# Altium PCB Dogfish3D R1.0.PcbDoc (part 2 of 2)
Units mil, origin at the board's own origin, x right, y up, seen from the top; angles counter-clockwise.
Board outline 6000 x 4000 mil, 4 copper layers (Top Layer, Groun Plane, Power Plane, Bottom Layer), stack 61.73 mil thick; 227 components, 145 nets, 705 pads, 165 vias.
Unrouted connection lines stored in the file: 286.
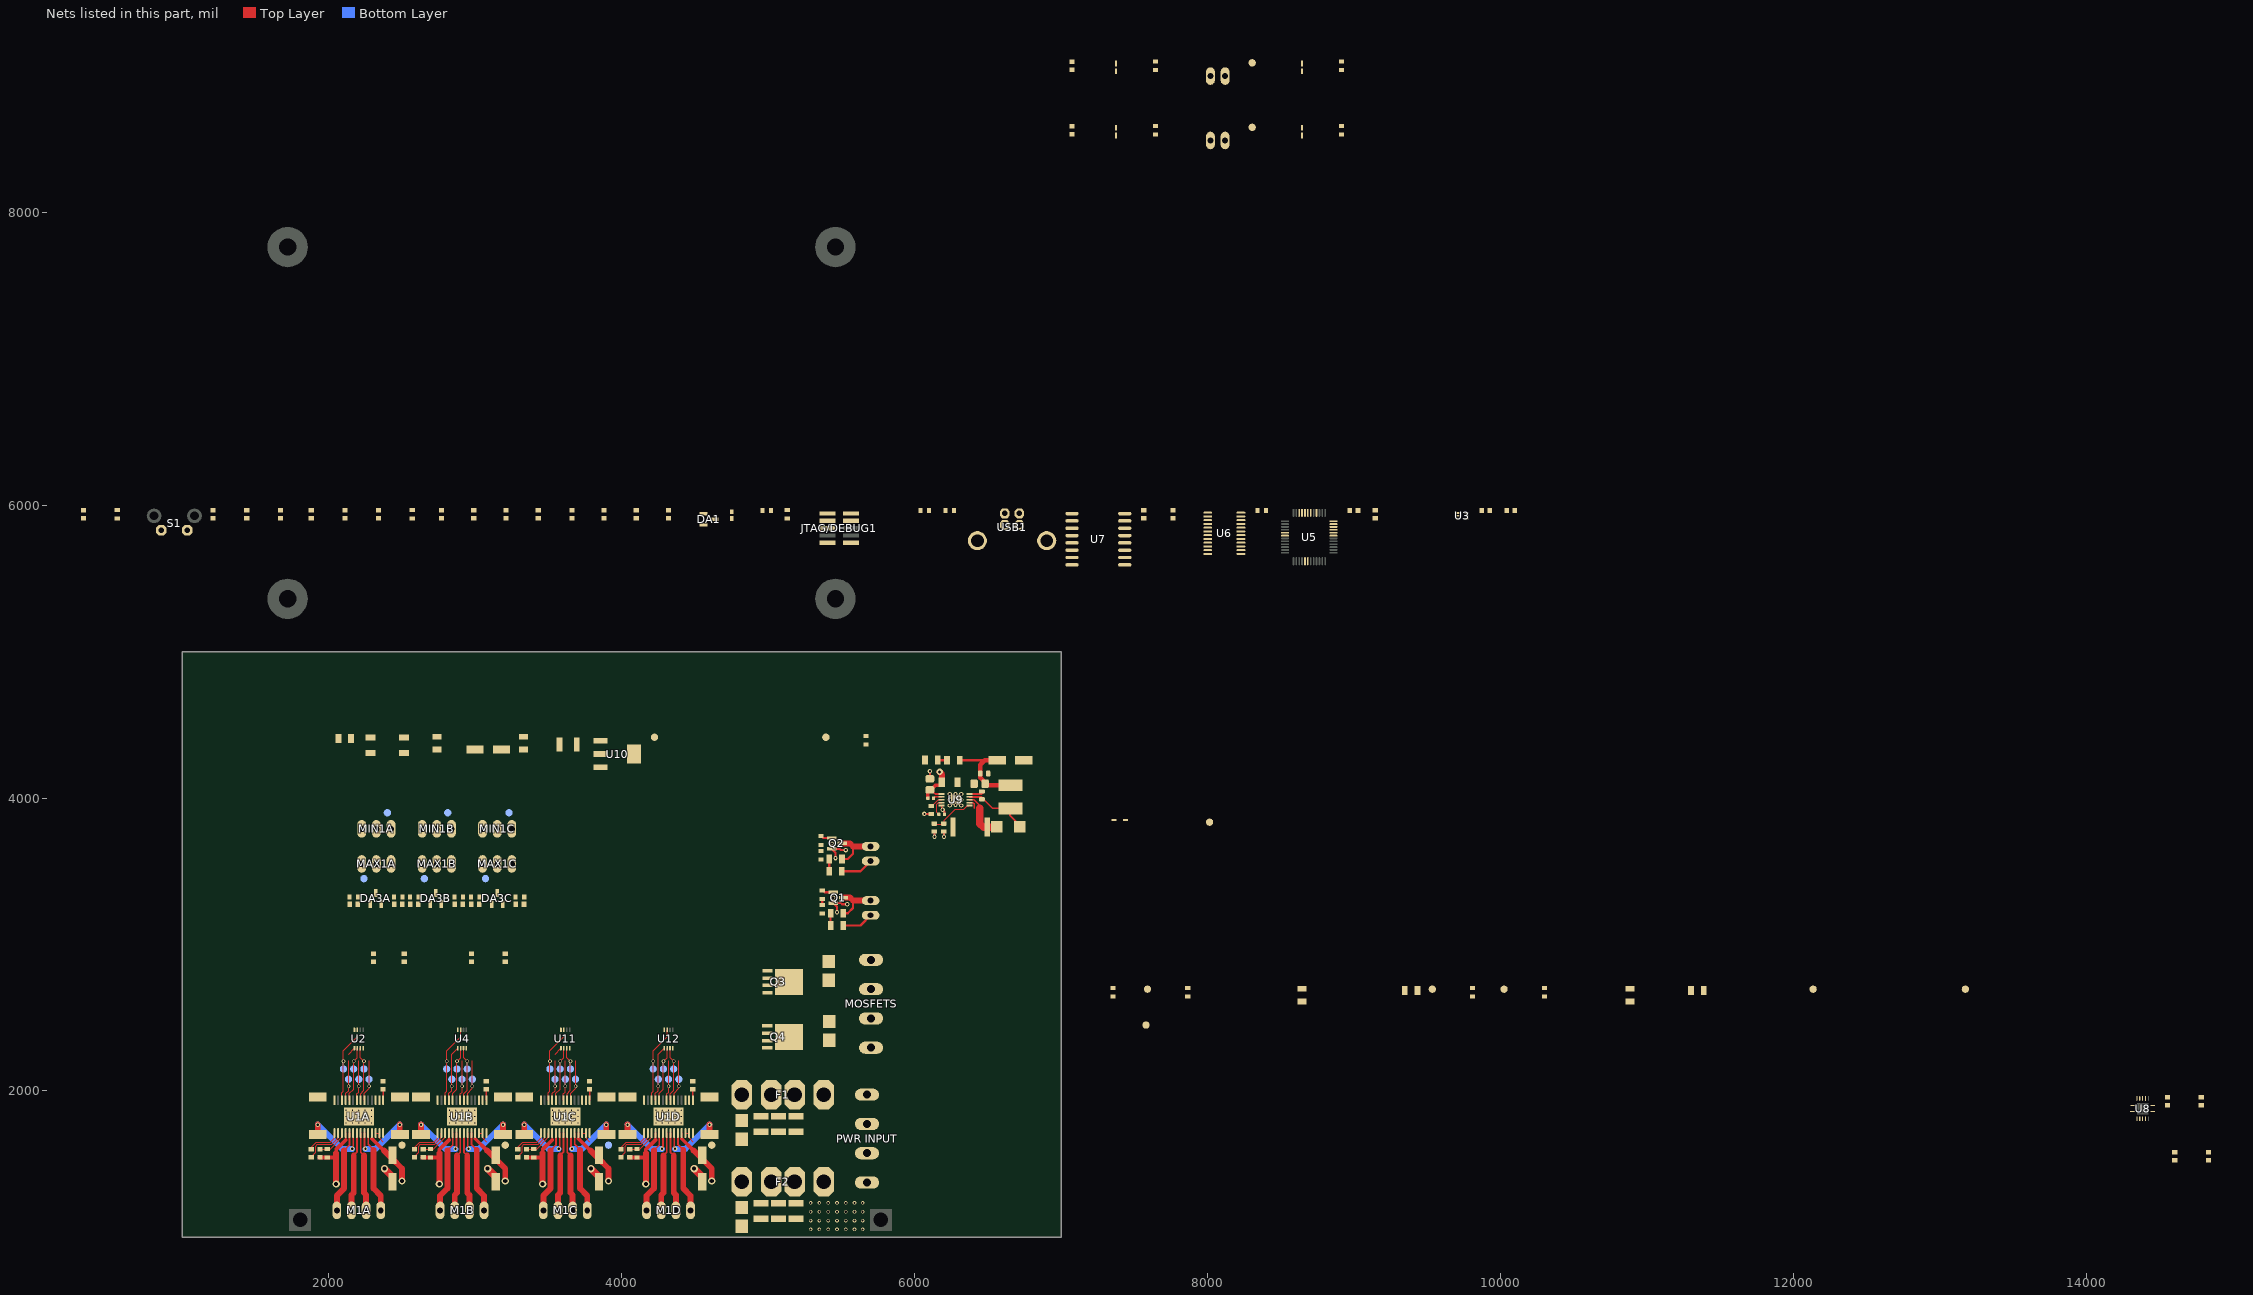
[diagram p4: the nets of this part, all layers, seen from the top]

## Via types
v1: diameter 19.68, hole 7.87, Top Layer to Bottom Layer, 64 vias
v2: diameter 25, hole 15, Top Layer to Bottom Layer, tented both sides, 52 vias
v3: diameter 30, hole 15, Top Layer to Bottom Layer, tented both sides, 27 vias
v4: diameter 50, hole 28, Top Layer to Bottom Layer, tented both sides, 12 vias
v5: diameter 30, hole 15, Top Layer to Bottom Layer, 9 vias
v6: diameter 45, hole 20, Top Layer to Bottom Layer, tented both sides, 1 vias

## Nets (pads, with @x,y where several pads share a name; then routed paths per layer and width w, separated by ;. In a path a pad name is that pad's centre, name@x,y a point inside that pad or via, vN(x,y) a via of type N, cw(c..) or ccw(c..) an arc to the next point about the centre after c; other vN are vias at no path point)
3.3VCC: C7.2 C8.2 C9.2 C10.2 C21.2 C22.2 C23.2 C24.2 C25.2 C26.2 C28.2 C29.2 C45.1 C47.2 C49.2 C50.2 C51.2 C52.2 FB1.2 JTAG/DEBUG1.1 MAX1A.3 MAX1B.3 MAX1C.3 MIN1A.3 MIN1B.3 MIN1C.3 R4A.1 R4B.1 R4C.1 R5A.1 R5B.1 R5C.1 R11.2 R33.2 R34A.2 R34B.2 TP18.1 U1A.16 U1A.17 U1B.16 U1B.17 U1C.16 U1C.17 U1D.16 U1D.17 U2.8 U3.1 U3.2 U3.5 U3.6 U4.8 U5.17 U5.36 U5.44 U8.1 U8.8 U10.3 U11.8 U12.8
+5VCC: C30.2 C31.2 C35.1 C36.1 C37.1 L1.2 R26.2 R27.2 R29.1 R32.1 TP16.1 U8.14 | length 686.4
  Top Layer w15: v3(6066.63,3892.08) R27.2@6114.41,3892.08 ; v3(6200.63,3736.08) R29.1@6200.63,3772.31 ; R26.2@6306.25,4258.02 6383.94,4258.02 6478.94,4258.02
  Top Layer w30: C37.1@6489.03,4099.69 6448.86,4139.86 6448.86,4167.59 6448.86,4227.82 6478.63,4257.59 C36.1@6564.08,4257.59 ; C37.1@6497.29,4087.33 L1.2@6654.63,4087.33
+12VCC1: C1A.1 C1B.1 C1C.1 C1D.1 C3A.1 C3B.1 C3C.1 C3D.1 C42.2 C43.2 C44.2 D11.2 F2.2 R1A.1 R1B.1 R1C.1 R1D.1 R6.1 U1A.4 U1A.11 U1B.4 U1B.11 U1C.4 U1C.11 U1D.4 U1D.11 | length 3675.7
  Top Layer w12: 2115.43,1665.43 U1A.4@2115.43,1712.8 ; 2294.57,1674.43 U1A.11@2294.57,1712.8 ; 2820.43,1665.43 U1B.4@2820.43,1712.8 ; 2999.57,1674.43 U1B.11@2999.57,1712.8 ; 3525.43,1665.43 U1C.4@3525.43,1712.8 ; 3704.57,1674.43 U1C.11@3704.57,1712.8 ; 4230.43,1665.43 U1D.4@4230.43,1712.8 ; 4409.57,1674.43 U1D.11@4409.57,1712.8
  Top Layer w25: C1A.1@1935,1545.47 2050,1545.47 ; 2050,1575 2050,1600 2115.43,1665.43 ; 2294.57,1674.43 2375,1594 ; C1B.1@2640,1545.47 2755,1545.47 ; 2755,1575 2755,1600 2820.43,1665.43 ; 2999.57,1674.43 3080,1594 ; C1C.1@3345,1545.47 3460,1545.47 ; 3460,1575 3460,1600 3525.43,1665.43 ; 3704.57,1674.43 3785,1594 ; C1D.1@4050,1545.47 4165,1545.47 ; 4165,1575 4165,1600 4230.43,1665.43 ; 4409.57,1674.43 4490,1594
  Top Layer w40: v4(2050,1365) 2050,1575 ; 2375,1594 2375,1595 C3A.1@2440,1530 ; C3A.1@2430,1540 2500,1470 v4(2500,1385) ; v4(2755,1365) 2755,1575 ; 3080,1594 3080,1595 C3B.1@3145,1530 ; C3B.1@3135,1540 3205,1470 v4(3205,1385) ; v4(3460,1365) 3460,1575 ; 3785,1594 3785,1595 C3C.1@3850,1530 ; C3C.1@3840,1540 3910,1470 v4(3910,1385) ; v4(4165,1365) 4165,1575 ; 4490,1594 4490,1595 C3D.1@4555,1530 ; C3D.1@4545,1540 4615,1470 v4(4615,1385)
+12VCC2: C32.1 C34.1 C39.2 C40.2 C41.2 D4.2 D6.2 D9.2 F1.2 FAN-1.1 FAN-2.1 MOSFETS.2 MOSFETS.4 R13.1 R16.1 R19.2 R22.2 R25.2 R31.2 U9.1 | length 696.9
  Top Layer w12: C34.1@6131.68,4036.95 6140.83,4027.8 U9.1@6184.83,4027.8
  Top Layer w15: R13.1@5503.31,3130 5630,3130 FAN-1.1@5700,3200 ; R16.1@5503.31,3500 5630,3500 FAN-2.1@5700,3570
  Top Layer w24: R25.2@6091.14,3997.22 C34.1@6091.14,4034.82 ; C34.1@6110.31,4054.02 6142.72,4086.43 C32.1@6168.15,4086.43
  Top Layer w40: v6(6171,4179) 6188.17,4161.83 C32.1@6188.17,4106.43
DIR1: TP6A.1 U1A.20 | length 333.1
  Top Layer w8: U1A.20@2243.54,1935 2243.54,1986.18 2275.16,2017.8 v2(2275.16,2032.8) 2275.16,2205
  Bottom Layer w8: v2(2275.16,2032.8) TP6A.1@2275.16,2082.8
DIR2: TP6B.1 U1B.20 | length 333.1
  Top Layer w8: U1B.20@2948.54,1935 2948.54,1986.18 2980.16,2017.8 v2(2980.16,2032.8) 2980.16,2205
  Bottom Layer w8: v2(2980.16,2032.8) TP6B.1@2980.16,2082.8
DIR3: TP6C.1 U1C.20 | length 333.1
  Top Layer w8: U1C.20@3653.54,1935 3653.54,1986.18 3685.16,2017.8 v2(3685.16,2032.8) 3685.16,2205
  Bottom Layer w8: v2(3685.16,2032.8) TP6C.1@3685.16,2082.8
DIR4: TP6D.1 U1D.20 | length 333.1
  Top Layer w8: U1D.20@4358.54,1935 4358.54,1986.18 4390.16,2017.8 v2(4390.16,2032.8) 4390.16,2205
  Bottom Layer w8: v2(4390.16,2032.8) TP6D.1@4390.16,2082.8
DRV_REF_CS: U6.5
DRV_REF_MOSI: U6.7
DRV_REF_SCLK: U6.8
E0_DRV_REF: TP1D.1 U1D.12 U1D.13 U6.17 | length 93.4
  Top Layer w8: U1D.12@4435.16,1712.8 U1D.13@4460.75,1712.8 4460.75,1679.25 4485,1655
EN1: TP2A.1 U1A.21 U2.7 | length 431.7
  Top Layer w8: U2.7@2214.84,2292.01 2214.84,2228.11 v2(2240.16,2202.8) 2240.16,2004.01 2217.95,1981.8 U1A.21@2217.95,1935
  Bottom Layer w8: TP2A.1@2240.16,2147.8 v2(2240.16,2202.8)
EN2: TP2B.1 U1B.21 U4.7 | length 431.7
  Top Layer w8: U4.7@2919.84,2292.01 2919.84,2228.11 v2(2945.16,2202.8) 2945.16,2004.01 2922.95,1981.8 U1B.21@2922.95,1935
  Bottom Layer w8: TP2B.1@2945.16,2147.8 v2(2945.16,2202.8)
EN3: TP2C.1 U1C.21 U11.7 | length 431.7
  Top Layer w8: U11.7@3624.84,2292.01 3624.84,2228.11 v2(3650.16,2202.8) 3650.16,2004.01 3627.95,1981.8 U1C.21@3627.95,1935
  Bottom Layer w8: TP2C.1@3650.16,2147.8 v2(3650.16,2202.8)
EN4: TP2D.1 U1D.21 U12.7 | length 431.7
  Top Layer w8: U12.7@4329.84,2292.01 4329.84,2228.11 v2(4355.16,2202.8) 4355.16,2004.01 4332.95,1981.8 U1D.21@4332.95,1935
  Bottom Layer w8: TP2D.1@4355.16,2147.8 v2(4355.16,2202.8)
EXP0_DRV_REF: U6.14
EXP1_DRV_REF: U6.11
GND: "PWR INPUT.2" "PWR INPUT.4" C3A.2 C3B.2 C3C.2 C3D.2 C4A.1 C4B.1 C4C.1 C4D.1 C5A.2 C5B.2 C5C.2 C6A.2 C6B.2 C6C.2 C7.1 C8.1 C9.1 C10.1 C11.1 C12.1 C13.1 C14.1 C17.1 C18.1 C19.1 C20.1 C21.1 C22.1 C23.1 C24.1 C25.1 C26.1 C27.1 C32.2 C34.2 C35.2 C36.2 C37.2 C38.2 C39.1 C40.1 C41.1 C42.1 C43.1 C44.1 C45.2 C46.1 C47.1 C48A.1 C48B.1 C49.1 C50.1 C51.1 C52.1 D8.1 D9.1 D10.1 D11.1 D12.1 D14A.1 D14B.1 DA3A.3 DA3B.3 DA3C.3 JTAG/DEBUG1.3 JTAG/DEBUG1.5 JTAG/DEBUG1.9 MAX1A.2 MAX1B.2 MAX1C.2 MIN1A.2 MIN1B.2 MIN1C.2 P1A.2 P1B.2 Q1.2 Q2.2 Q3.1 Q3.2 Q3.3 Q4.1 Q4.2 Q4.3 R2A.1 R2B.1 R2C.1 R2D.1 R3A.1 R3B.1 R3C.1 R3D.1 R15.2 R18.2 R21.2 R24.2 R28.1 R30.2 S1.2 U1A.14 U1A.28 U1A.29 U1B.14 U1B.28 U1B.29 U1C.14 U1C.28 U1C.29 U1D.14 U1D.28 U1D.29 U2.4 U4.4 U5.5 U5.18 U5.35 U5.42 U6.3 U6.4 U6.9 U6.10 U6.13 U6.16 U6.21 U6.24 U7.9 U7.15 U9.5 U9.7 U9.11 U10.2 U10.4 U11.4 U12.4 | length 1094.3
  Top Layer w8: v3@5434.57,3689.57 v3(5435,3690) ; v3@5444.57,3319.57 v3(5445,3320)
  Top Layer w10: C3A.2@2435,1379.45 C3A.2@2435,1415 ; C3B.2@3140,1379.45 C3B.2@3140,1415 ; C3C.2@3845,1379.45 C3C.2@3845,1415 ; C3D.2@4550,1379.45 C3D.2@4550,1415 ; v3@6184.65,3926.97 U9.5@6184.65,3949.11
  Top Layer w12: v3@6184.65,3926.97 6205.14,3906.48 ; U9.7@6373.8,3968.74 6398.49,3968.74 6406.88,3960.35 6406.88,3929.87
  Top Layer w15: v3@5434.57,3689.57 Q2.2@5434.57,3652.6 ; v3@5444.57,3319.57 Q1.2@5444.57,3282.6 ; v3(5460,3590) 5460,3627.17 Q2.2@5434.57,3652.6 ; v3(5470,3220) 5470,3257.17 Q1.2@5444.57,3282.6 ; v3(5530,3645) 5495,3645 5487.4,3652.6 Q2.2@5434.57,3652.6 ; v3(5540,3275) 5505,3275 5497.4,3282.6 Q1.2@5444.57,3282.6 ; C34.2@6104.63,4131.85 v3(6104.63,4182.85) ; v3(6135.63,3736.08) R30.2@6135.64,3772.3 ; C38.2@6205.14,3889.48 6205.14,3906.48
  Top Layer w50: v4(2380,1470) C3A.2@2435,1415 ; v4(3085,1470) C3B.2@3140,1415 ; v4(3790,1470) C3C.2@3845,1415 ; v4(4495,1470) C3D.2@4550,1415
  other v1: 2118.39,1781.69 2161.69,1781.69 2205,1781.69 2248.31,1781.69 2291.61,1781.69 2823.39,1781.69 2866.69,1781.69 2910,1781.69 2953.31,1781.69 2996.61,1781.69 3528.39,1781.69 3571.69,1781.69 3615,1781.69 3658.31,1781.69 3701.61,1781.69 4233.39,1781.69 4276.69,1781.69 4320,1781.69 4363.31,1781.69 4406.61,1781.69 2118.39,1825 2161.69,1825 2205,1825 2248.31,1825 2291.61,1825 2823.39,1825 2866.69,1825 2910,1825 2953.31,1825 2996.61,1825 3528.39,1825 3571.69,1825 3615,1825 3658.31,1825 3701.61,1825 4233.39,1825 4276.69,1825 4320,1825 4363.31,1825 4406.61,1825 2118.39,1868.31 2161.69,1868.31 2205,1868.31 2248.31,1868.31 2291.61,1868.31 2823.39,1868.31 2866.69,1868.31 2910,1868.31 2953.31,1868.31 2996.61,1868.31 3528.39,1868.31 3571.69,1868.31 3615,1868.31 3658.31,1868.31 3701.61,1868.31 4233.39,1868.31 4276.69,1868.31 4320,1868.31 4363.31,1868.31 4406.61,1868.31
  other v2: 5290,1055 5350,1055 5410,1055 5470,1055 5530,1055 5590,1055 5645,1055 5290,1115 5350,1115 5410,1115 5470,1115 5530,1115 5590,1115 5645,1115 5290,1176 5350,1176 5410,1176 5470,1176 5530,1176 5590,1176 5645,1176 5290,1236 5350,1236 5410,1236 5470,1236 5530,1236 5590,1236 5645,1236
  other v3: 6191.14,3920.48
  other v5: 6239.94,3949.06 6318.49,3949.11 6279.31,3953.43 6239.94,3988.43 6279.31,3988.43 6318.68,3988.43 6239.94,4027.8 6279.31,4027.8 6318.68,4027.8
INPUT_GND: C15.1 C16.1 DA1.3 U7.2 U7.8 USB1.4 USB1.5 USB1.6
MAX_ES1: C6A.1 DA3A.1 MAX1A.1 R5A.2 TP9A.1
MAX_ES2: C6B.1 DA3B.1 MAX1B.1 R5B.2 TP9B.1
MAX_ES3: C6C.1 DA3C.1 MAX1C.1 R5C.2 TP9C.1
MIN_ES1: C5A.1 DA3A.2 MIN1A.1 R4A.2 TP8A.1
MIN_ES2: C5B.1 DA3B.2 MIN1B.1 R4B.2 TP8B.1
MIN_ES3: C5C.1 DA3C.2 MIN1C.1 R4C.2 TP8C.1
MOD0E1: TP5A.1 U1A.24 U2.6 | length 434.4
  Top Layer w8: U1A.24@2141.18,1935 2141.18,1983.82 2170.16,2012.8 v2(2170.16,2202.8) 2195.16,2227.8 U2.6@2195.16,2292.01
  Bottom Layer w8: TP5A.1@2170.16,2147.8 v2(2170.16,2202.8)
MOD0E2: TP5B.1 U1B.24 U4.6 | length 434.4
  Top Layer w8: U1B.24@2846.18,1935 2846.18,1983.82 2875.16,2012.8 v2(2875.16,2202.8) 2900.16,2227.8 U4.6@2900.16,2292.01
  Bottom Layer w8: TP5B.1@2875.16,2147.8 v2(2875.16,2202.8)
MOD0E3: TP5C.1 U1C.24 U11.6 | length 434.4
  Top Layer w8: U1C.24@3551.18,1935 3551.18,1983.82 3580.16,2012.8 v2(3580.16,2202.8) 3605.16,2227.8 U11.6@3605.16,2292.01
  Bottom Layer w8: TP5C.1@3580.16,2147.8 v2(3580.16,2202.8)
MOD0E4: TP5D.1 U1D.24 U12.6 | length 434.4
  Top Layer w8: U1D.24@4256.18,1935 4256.18,1983.82 4285.16,2012.8 v2(4285.16,2202.8) 4310.16,2227.8 U12.6@4310.16,2292.01
  Bottom Layer w8: TP5D.1@4285.16,2147.8 v2(4285.16,2202.8)
MOD1E1: TP4A.1 U1A.25 U2.5 | length 385.1
  Top Layer w8: U1A.25@2115.59,1935 2115.59,1983.23 2135.16,2002.8 v2(2135.16,2032.8) 2135.16,2205 ; 2135.16,2251.69 U2.5@2175.47,2292.01
  Bottom Layer w8: v2(2135.16,2032.8) TP4A.1@2135.16,2082.8
MOD1E2: TP4B.1 U1B.25 U4.5 | length 431.8
  Top Layer w8: U1B.25@2820.59,1935 2820.59,1983.23 2840.16,2002.8 v2(2840.16,2032.8) 2840.16,2251.69 U4.5@2880.47,2292.01
  Bottom Layer w8: v2(2840.16,2032.8) TP4B.1@2840.16,2082.8
MOD1E3: TP4C.1 U1C.25 U11.5 | length 385.1
  Top Layer w8: U1C.25@3525.59,1935 3525.59,1983.23 3545.16,2002.8 v2(3545.16,2032.8) 3545.16,2205 ; 3545.16,2251.69 U11.5@3585.47,2292.01
  Bottom Layer w8: v2(3545.16,2032.8) TP4C.1@3545.16,2082.8
MOD1E4: TP4D.1 U1D.25 U12.5 | length 431.8
  Top Layer w8: U1D.25@4230.59,1935 4230.59,1983.23 4250.16,2002.8 v2(4250.16,2032.8) 4250.16,2251.69 U12.5@4290.47,2292.01
  Bottom Layer w8: v2(4250.16,2032.8) TP4D.1@4250.16,2082.8
MOD2E1: TP3A.1 U1A.26 U2.3 | length 533.7
  Top Layer w8: U1A.26@2090,1935 2090,1987.64 2100.16,1997.8 v2(2100.16,2202.8) 2100.16,2275.16 2195.16,2370.16
  Bottom Layer w8: TP3A.1@2100.16,2147.8 v2(2100.16,2202.8)
MOD2E2: TP3B.1 U1B.26 U4.3 | length 581.5
  Top Layer w8: U1B.26@2795,1935 2795,1987.64 2805.16,1997.8 v2(2805.16,2202.8) 2805.16,2275.16 2900.16,2370.16 U4.3@2900.16,2417.99
  Bottom Layer w8: TP3B.1@2805.16,2147.8 v2(2805.16,2202.8)
MOD2E3: TP3C.1 U1C.26 U11.3 | length 533.7
  Top Layer w8: U1C.26@3500,1935 3500,1987.64 3510.16,1997.8 v2(3510.16,2202.8) 3510.16,2275.16 3605.16,2370.16
  Bottom Layer w8: TP3C.1@3510.16,2147.8 v2(3510.16,2202.8)
MOD2E4: TP3D.1 U1D.26 U12.3 | length 581.5
  Top Layer w8: U1D.26@4205,1935 4205,1987.64 4215.16,1997.8 v2(4215.16,2202.8) 4215.16,2275.16 4310.16,2370.16 U12.3@4310.16,2417.99
  Bottom Layer w8: TP3D.1@4215.16,2147.8 v2(4215.16,2202.8)
NetC1A_2: C1A.2 R1A.2 U1A.3 | length 217.6
  Top Layer w8: C1A.2@1935,1602.56 2008.77,1602.56 2089.84,1683.63 U1A.3@2089.84,1712.8
NetC1B_2: C1B.2 R1B.2 U1B.3 | length 217.6
  Top Layer w8: C1B.2@2640,1602.56 2713.77,1602.56 2794.84,1683.63 U1B.3@2794.84,1712.8
NetC1C_2: C1C.2 R1C.2 U1C.3 | length 217.6
  Top Layer w8: C1C.2@3345,1602.56 3418.77,1602.56 3499.84,1683.63 U1C.3@3499.84,1712.8
NetC1D_2: C1D.2 R1D.2 U1D.3 | length 217.6
  Top Layer w8: C1D.2@4050,1602.56 4123.77,1602.56 4204.84,1683.63 U1D.3@4204.84,1712.8
NetC2A_1: C2A.1 U1A.1 | length 241.2
  Top Layer w8: C2A.1@1875,1595 1875,1610 1915,1650 2010,1650 2038.66,1678.66 U1A.1@2038.66,1712.8
NetC2A_2: C2A.2 U1A.2 | length 301.6
  Top Layer w8: C2A.2@1875,1547.44 1910,1582.44 1910,1623.79 1921.21,1635 2020,1635 2064.25,1679.25 U1A.2@2064.25,1712.8
NetC2B_1: C2B.1 U1B.1 | length 241.2
  Top Layer w8: C2B.1@2580,1595 2580,1610 2620,1650 2715,1650 2743.66,1678.66 U1B.1@2743.66,1712.8
NetC2B_2: C2B.2 U1B.2 | length 301.6
  Top Layer w8: C2B.2@2580,1547.44 2615,1582.44 2615,1623.79 2626.21,1635 2725,1635 2769.25,1679.25 U1B.2@2769.25,1712.8
NetC2C_1: C2C.1 U1C.1 | length 241.2
  Top Layer w8: C2C.1@3285,1595 3285,1610 3325,1650 3420,1650 3448.66,1678.66 U1C.1@3448.66,1712.8
NetC2C_2: C2C.2 U1C.2 | length 301.6
  Top Layer w8: C2C.2@3285,1547.44 3320,1582.44 3320,1623.79 3331.21,1635 3430,1635 3474.25,1679.25 U1C.2@3474.25,1712.8
NetC2D_1: C2D.1 U1D.1 | length 241.2
  Top Layer w8: C2D.1@3990,1595 3990,1610 4030,1650 4125,1650 4153.66,1678.66 U1D.1@4153.66,1712.8
NetC2D_2: C2D.2 U1D.2 | length 301.6
  Top Layer w8: C2D.2@3990,1547.44 4025,1582.44 4025,1623.79 4036.21,1635 4135,1635 4179.25,1679.25 U1D.2@4179.25,1712.8
NetC4A_2: C4A.2 U1A.15 | length 73.9
  Top Layer w10: U1A.15@2371.34,1937.2 C4A.2@2371.34,2011.1
NetC4B_2: C4B.2 U1B.15 | length 73.9
  Top Layer w10: U1B.15@3076.34,1937.2 C4B.2@3076.34,2011.1
NetC4C_2: C4C.2 U1C.15 | length 73.9
  Top Layer w10: U1C.15@3781.34,1937.2 C4C.2@3781.34,2011.1
NetC4D_2: C4D.2 U1D.15 | length 73.9
  Top Layer w10: U1D.15@4486.34,1937.2 C4D.2@4486.34,2011.1
NetC11_2: C11.2 C12.2 U6.6
NetC13_2: C13.2 U7.12 U7.14
NetC15_2: C15.2 U7.1 USB1.1
NetC16_2: C16.2 U7.3 U7.4 U7.5
NetC17_2: C17.2 C18.2 FB1.1 U5.6
NetC19_2: C19.2 C20.2 U5.43
NetC28_1: C28.1 C29.1 C30.1 C31.1 U8.7
NetC33_1: C33.1 U9.10 | length 93.4
  Top Layer w12: U9.10@6373.8,4027.8 6458.8,4027.8 C33.1@6464.77,4033.77
NetC33_2: C33.2 D7.C L1.1 U9.9 | length 475.6
  Top Layer w12: U9.9@6373.8,4008.11 6455.12,4008.11 6483,3980.23 6531.97,3931.26 6651,3931.26 6651,3881.74 D7.C@6733.74,3799
NetC38_1: C38.1 U9.4 | length 112.3
  Top Layer w8: C38.1@6167.13,3888.43 6152.35,3903.2 6152.35,3958.12 6162.4,3968.17 U9.4@6184.65,3968.17
NetC46_2: C46.2 F3.1 U10.1
NetD1_1: D1.1 FAN-1.2 Q1.3 | length 335
  Top Layer w15: D1.1@5503.39,3213.5 5543.5,3213.5 5580,3250 5580,3300
  Top Layer w40: Q1.3@5515,3320 5560,3320 5580,3300 FAN-1.2@5700,3300
NetD1_2: D1.2 R13.2 | length 83.4
  Top Layer w15: R13.2@5426.77,3130.08 D1.2@5426.77,3213.5
NetD2_1: D2.1 FAN-2.2 Q2.3 | length 335
  Top Layer w15: D2.1@5503.39,3583.5 5543.5,3583.5 5580,3620 5580,3670
  Top Layer w40: Q2.3@5515,3690 5560,3690 5580,3670 FAN-2.2@5700,3670
NetD2_2: D2.2 R16.2 | length 83.4
  Top Layer w15: R16.2@5416.77,3500.08 D2.2@5416.77,3583.5
NetD3_1: D3.1 D4.1 MOSFETS.3 Q3.5 TP12.1
NetD3_2: D3.2 R19.1
NetD5_1: D5.1 D6.1 MOSFETS.1 Q4.5 TP14.1
NetD5_2: D5.2 R22.1
NetD7_A: D7.A R28.2 U9.8 | length 307.6
  Top Layer w12: U9.8@6373.8,3988.43 6405.67,3988.43 6444.88,3949.22
  Top Layer w50: 6444.88,3930 6444.88,3825.26 6470.14,3800 ; R28.2@6485.14,3800 D7.A@6565,3800
NetD8_2: D8.2 R26.1 | length 64.1
  Top Layer w8: D8.2@6157.54,4259.92 D8.2@6159.04,4258.43
  Top Layer w15: D8.2@6159.04,4258.43 R26.1@6221.01,4258.43
NetD10_2: D10.2 D13A.2 D13B.2 R31.1 TP17.1
NetD12_2: D12.2 R33.1
NetF1_1: "PWR INPUT.1" F1.1
NetF2_1: "PWR INPUT.3" F2.1
NetF3_2: F3.2 R32.2
NetM1A_1: M1A.1 U1A.5 | length 563.4
  Top Layer w12: 2105,1595 2141.02,1631.02 U1A.5@2141.02,1712.8
  Top Layer w40: M1A.1@2055,1185 2055,1285 2105,1335 2105,1595
NetM1A_2: M1A.2 U1A.7 | length 543.2
  Top Layer w12: 2170,1560 2192.2,1582.2 U1A.7@2192.2,1712.8
  Top Layer w40: M1A.2@2155,1185 2155,1290 2170,1305 2170,1560
NetM1A_3: M1A.3 U1A.8 | length 543.2
  Top Layer w12: U1A.8@2217.8,1712.8 2217.8,1582.2 2240,1560
  Top Layer w40: 2240,1560 2240,1305 2255,1290 M1A.3@2255,1185
NetM1A_4: M1A.4 U1A.10 | length 563.4
  Top Layer w12: U1A.10@2268.98,1712.8 2268.98,1635 2305,1598.98
  Top Layer w40: 2305,1598.98 2305,1335 2355,1285 M1A.4@2355,1185
NetM1B_1: M1B.1 U1B.5 | length 563.4
  Top Layer w12: 2810,1595 2846.02,1631.02 U1B.5@2846.02,1712.8
  Top Layer w40: M1B.1@2760,1185 2760,1285 2810,1335 2810,1595
NetM1B_2: M1B.2 U1B.7 | length 543.2
  Top Layer w12: 2875,1560 2897.2,1582.2 U1B.7@2897.2,1712.8
  Top Layer w40: M1B.2@2860,1185 2860,1290 2875,1305 2875,1560
NetM1B_3: M1B.3 U1B.8 | length 543.2
  Top Layer w12: U1B.8@2922.8,1712.8 2922.8,1582.2 2945,1560
  Top Layer w40: 2945,1560 2945,1305 2960,1290 M1B.3@2960,1185
NetM1B_4: M1B.4 U1B.10 | length 563.4
  Top Layer w12: U1B.10@2973.98,1712.8 2973.98,1635 3010,1598.98
  Top Layer w40: 3010,1598.98 3010,1335 3060,1285 M1B.4@3060,1185
NetM1C_1: M1C.1 U1C.5 | length 563.4
  Top Layer w12: 3515,1595 3551.02,1631.02 U1C.5@3551.02,1712.8
  Top Layer w40: M1C.1@3465,1185 3465,1285 3515,1335 3515,1595
NetM1C_2: M1C.2 U1C.7 | length 543.2
  Top Layer w12: 3580,1560 3602.2,1582.2 U1C.7@3602.2,1712.8
  Top Layer w40: M1C.2@3565,1185 3565,1290 3580,1305 3580,1560
NetM1C_3: M1C.3 U1C.8 | length 543.2
  Top Layer w12: U1C.8@3627.8,1712.8 3627.8,1582.2 3650,1560
  Top Layer w40: 3650,1560 3650,1305 3665,1290 M1C.3@3665,1185
NetM1C_4: M1C.4 U1C.10 | length 563.4
  Top Layer w12: U1C.10@3678.98,1712.8 3678.98,1635 3715,1598.98
  Top Layer w40: 3715,1598.98 3715,1335 3765,1285 M1C.4@3765,1185
NetM1D_1: M1D.1 U1D.5 | length 563.4
  Top Layer w12: 4220,1595 4256.02,1631.02 U1D.5@4256.02,1712.8
  Top Layer w40: M1D.1@4170,1185 4170,1285 4220,1335 4220,1595
NetM1D_2: M1D.2 U1D.7 | length 543.2
  Top Layer w12: 4285,1560 4307.2,1582.2 U1D.7@4307.2,1712.8
  Top Layer w40: M1D.2@4270,1185 4270,1290 4285,1305 4285,1560
NetM1D_3: M1D.3 U1D.8 | length 543.2
  Top Layer w12: U1D.8@4332.8,1712.8 4332.8,1582.2 4355,1560
  Top Layer w40: 4355,1560 4355,1305 4370,1290 M1D.3@4370,1185
NetM1D_4: M1D.4 U1D.10 | length 563.4
  Top Layer w12: U1D.10@4383.98,1712.8 4383.98,1635 4420,1598.98
  Top Layer w40: 4420,1598.98 4420,1335 4470,1285 M1D.4@4470,1185
NetP1A_1: P1A.1 R34A.1 R35A.2
NetP1B_1: P1B.1 R34B.1 R35B.2
NetQ1_1: Q1.1 R14.2 | length 74.6
  Top Layer w15: R14.2@5375,3369.53 5387.13,3357.4 Q1.1@5444.57,3357.4
NetQ2_1: Q2.1 R17.2 | length 74.6
  Top Layer w15: R17.2@5365,3739.53 5377.13,3727.4 Q2.1@5434.57,3727.4
NetQ3_4: Q3.4 R20.2
NetQ4_4: Q4.4 R23.2
NetR2A_2: R2A.2 U1A.9 | length 481.8
  Top Layer w12: U1A.9@2243.39,1712.8 2243.39,1611.61 v3(2250,1605)
  Top Layer w40: R2A.2@2485,1702.05 v3(2485,1770)
  Bottom Layer w40: v3(2250,1605) 2320,1605 v3(2485,1770)
NetR2B_2: R2B.2 U1B.9 | length 481.8
  Top Layer w12: U1B.9@2948.39,1712.8 2948.39,1611.61 v3(2955,1605)
  Top Layer w40: R2B.2@3190,1702.05 v3(3190,1770)
  Bottom Layer w40: v3(2955,1605) 3025,1605 v3(3190,1770)
NetR2C_2: R2C.2 U1C.9 | length 481.8
  Top Layer w12: U1C.9@3653.39,1712.8 3653.39,1611.61 v3(3660,1605)
  Top Layer w40: R2C.2@3895,1702.05 v3(3895,1770)
  Bottom Layer w40: v3(3660,1605) 3730,1605 v3(3895,1770)
NetR2D_2: R2D.2 U1D.9 | length 481.8
  Top Layer w12: U1D.9@4358.39,1712.8 4358.39,1611.61 v3(4365,1605)
  Top Layer w40: R2D.2@4600,1702.05 v3(4600,1770)
  Bottom Layer w40: v3(4365,1605) 4435,1605 v3(4600,1770)
NetR3A_2: R3A.2 U1A.6 | length 481.8
  Top Layer w12: v3(2160,1605) 2166.61,1611.61 U1A.6@2166.61,1712.8
  Top Layer w40: R3A.2@1925,1702.05 v3(1925,1770)
  Bottom Layer w40: v3(1925,1770) 2090,1605 v3(2160,1605)
NetR3B_2: R3B.2 U1B.6 | length 481.8
  Top Layer w12: v3(2865,1605) 2871.61,1611.61 U1B.6@2871.61,1712.8
  Top Layer w40: R3B.2@2630,1702.05 v3(2630,1770)
  Bottom Layer w40: v3(2630,1770) 2795,1605 v3(2865,1605)
NetR3C_2: R3C.2 U1C.6 | length 481.8
  Top Layer w12: v3(3570,1605) 3576.61,1611.61 U1C.6@3576.61,1712.8
  Top Layer w40: R3C.2@3335,1702.05 v3(3335,1770)
  Bottom Layer w40: v3(3335,1770) 3500,1605 v3(3570,1605)
NetR3D_2: R3D.2 U1D.6 | length 481.8
  Top Layer w12: v3(4275,1605) 4281.61,1611.61 U1D.6@4281.61,1712.8
  Top Layer w40: R3D.2@4040,1702.05 v3(4040,1770)
  Bottom Layer w40: v3(4040,1770) 4205,1605 v3(4275,1605)
NetR6_2: R6.2 U6.1 U6.12 U6.15 U6.18 U6.19 U6.22
NetR12_1: R12.1 S1.1
NetR14_1: R14.1 R15.1 TP10.1 U8.13 | length 40.9
  Top Layer w15: R15.1@5370,3269.53 R14.1@5370,3310.47
NetR17_1: R17.1 R18.1 TP11.1 U8.12
NetR20_1: R20.1 R21.1 TP13.1 U8.11
NetR23_1: R23.1 R24.1 TP15.1 U8.10
NetR25_1: R25.1 U9.2 | length 56.9
  Top Layer w12: R25.1@6131.5,3999.17 6140.56,4008.22 U9.2@6184.65,4008.22
NetR27_1: R27.1 U9.3 | length 69.3
  Top Layer w8: R27.1@6128.97,3955.56 6128.97,3955.95 6160.87,3987.85 U9.3@6184.65,3987.85
NetR29_2: R29.2 R30.1 U9.6 | length 289.6
  Top Layer w7: R30.1@6137.17,3821.66 R29.2@6193.26,3821.66 ; R29.2@6200.8,3829.2 6200.8,3848.06 6276.17,3923.43 6334.31,3923.43 6360,3949.11 U9.6@6373.61,3949.11
PWM0: U8.2
PWM1: U8.3
PWM2: U8.4
PWM3: U8.5
R_N: DA1.1 R8.2 USB1.2
R_P: DA1.2 R10.2 USB1.3
REF1: TP1A.1 U1A.12 U1A.13 U6.2 | length 93.4
  Top Layer w8: U1A.12@2320.16,1712.8 U1A.13@2345.75,1712.8 2345.75,1679.25 2370,1655
REF2: TP1B.1 U1B.12 U1B.13 U6.23 | length 93.4
  Top Layer w8: U1B.12@3025.16,1712.8 U1B.13@3050.75,1712.8 3050.75,1679.25 3075,1655
REF3: TP1C.1 U1C.12 U1C.13 U6.20 | length 93.4
  Top Layer w8: U1C.12@3730.16,1712.8 U1C.13@3755.75,1712.8 3755.75,1679.25 3780,1655
RESET: C27.2 JTAG/DEBUG1.10 R11.1 R12.2 U5.40
SPD: U5.31 U7.13
STEP1: TP7A.1 U1A.22 | length 325.3
  Top Layer w8: U1A.22@2192.36,1935 2192.36,1980 2205.16,1992.8 v2(2205.16,2032.8) 2205.16,2205
  Bottom Layer w8: v2(2205.16,2032.8) TP7A.1@2205.16,2082.8
STEP2: TP7B.1 U1B.22 | length 325.3
  Top Layer w8: U1B.22@2897.36,1935 2897.36,1980 2910.16,1992.8 v2(2910.16,2032.8) 2910.16,2205
  Bottom Layer w8: v2(2910.16,2032.8) TP7B.1@2910.16,2082.8
STEP3: TP7C.1 U1C.22 | length 325.3
  Top Layer w8: U1C.22@3602.36,1935 3602.36,1980 3615.16,1992.8 v2(3615.16,2032.8) 3615.16,2205
  Bottom Layer w8: v2(3615.16,2032.8) TP7C.1@3615.16,2082.8
STEP4: TP7D.1 U1D.22 | length 325.3
  Top Layer w8: U1D.22@4307.36,1935 4307.36,1980 4320.16,1992.8 v2(4320.16,2032.8) 4320.16,2205
  Bottom Layer w8: v2(4320.16,2032.8) TP7D.1@4320.16,2082.8
TCK/SWDCLK: JTAG/DEBUG1.4 U5.45
THERM_AN1: C48A.2 D13A.1 D14A.2 R35A.1 TP19A.1 U3.3
THERM_AN2: C48B.2 D13B.1 D14B.2 R35B.1 TP19B.1 U3.4
TMS/SWDIO: JTAG/DEBUG1.2 U5.46
UD_N: R8.1 U7.6
UD_P: R10.1 U7.7
UI_N: R9.2 U7.11
UI_P: R7.2 U7.10
UMCU_N: R9.1 U5.33
UMCU_P: R7.1 U5.34
VBUS: C14.2 U5.32 U7.16
pads on no net: JTAG/DEBUG1.6 JTAG/DEBUG1.7 JTAG/DEBUG1.8 S1.3 S1.4 U1A.18 U1A.19 U1A.23 U1A.27 U1B.18 U1B.19 U1B.23 U1B.27 U1C.18 U1C.19 U1C.23 U1C.27 U1D.18 U1D.19 U1D.23 U1D.27 U2.1 U2.2 U4.1 U4.2 U5.1 U5.2 U5.3 U5.4 U5.7 U5.8 U5.9 U5.10 U5.11 U5.12 U5.13 U5.14 U5.15 U5.16 U5.19 U5.20 U5.21 U5.22 U5.23 U5.24 U5.25 U5.26 U5.27 U5.28 U5.29 U5.30 U5.37 U5.38 U5.39 U5.41 U5.47 U5.48 U8.6 U8.9 U8.15 U11.1 U11.2 U12.1 U12.2
copper on no net:
  other v1: 14363.35,1858.35 14406.65,1858.35 14363.35,1901.65 14406.65,1901.65

## Polygon pours and split planes (outlines as drawn)
+12VCC2 on Top Layer "Top Layer-No Net" (solid, remove dead copper, pour order 82): 5945,2815.36 5945,3020.36 5195,3020.36 5195,2940.36 5375,2940.36 5375,2815.36
GND on Top Layer "Top Layer-No Net" (solid, remove dead copper, pour order 84): 5035.89,2845.36 4950.89,2845.36 4950.89,2990.36 4614.78,2990.36 4614.78,2655.36 4950.89,2655.36 4950.89,2705.36 5035.89,2705.36
NetD3_1 on Top Layer "Top Layer-No Net" (solid, remove dead copper, pour order 76): 5943.35,2624.23 5048.35,2624.23 5048.35,2869.23 4958.35,2869.23 4958.35,3004.23 5038.35,3004.23 5038.35,2929.23 5358.35,2929.23 5358.35,2809.23 5943.35,2809.23
+12VCC2 on Top Layer "Top Layer-No Net" (solid, remove dead copper, pour order 82): 5945,2415.36 5945,2620.36 5195,2620.36 5195,2540.36 5375,2540.36 5375,2415.36
NetD5_1 on Top Layer "Top Layer-No Net" (solid, remove dead copper, pour order 69): 5945,2230.36 5945,2140.36 5945,2110.36 5050.68,2110.36 5050.68,2140.36 5050.68,2230.36 5050.68,2275.36 5045.68,2275.36 5045.68,2475.36 4965.68,2475.36 4965.68,2610.36 5020.68,2610.36 5020.68,2535.36 5365.68,2535.36 5365.68,2415.36 5945,2415.36
GND on Top Layer "Top Layer-No Net" (solid, remove dead copper, pour order 84): 5034.99,2470.86 4949.99,2470.86 4949.99,2615.86 4613.88,2615.86 4613.88,2280.86 4949.99,2280.86 4949.99,2330.86 5034.99,2330.86
NetC33_2 on Top Layer "SMPS" (solid, pour order 53): 6416,4003 6438.77,3980.23 6483,3980.23 6589.23,3874 6605,3874 6621,3858 6621,3782 6659,3744 6745,3744 6763,3762 6763,3844 6763,3957 6717,4003 6706,4014 6434,4014 6419,4014 6416,4011
NetD7_A on Top Layer "SMPS" (solid, pour order 51): 6419,3970 6419,3834 6419,3785 6468,3736 6581,3736 6605,3760 6605,3849 6593,3861 6576,3861 6495,3942 6468,3969 6422,3969
GND on Top Layer "SMPS" (solid, pour order 55): 6402,3937 6374,3909 6286,3909 6236,3859 6236,3736 6361,3736 6410,3785 6412,3787 6412,3920 6412,3937
+12VCC1 on Top Layer "Top Layer-No Net" (solid, remove dead copper, pour order 26): 5245,1210 5245,1260 5095,1260 5095,1565 4700,1565 4700,1280 4775,1280 4775,1165 4865,1165 4865,1210
GND on Top Layer "Top Layer-No Net" (solid, remove dead copper, pour order 24): 5875,1420 5530,1420 5530,1260 5255,1260 5255,1200 4875,1200 4875,1155 4760,1155 4760,1015 5875,1015
NetF2_1 on Top Layer "Top Layer-No Net" (solid, remove dead copper, pour order 20): 5855,1665 5530,1665 5530,1565 5100,1565 5105,1560 5105,1270 5525,1270 5520,1275 5520,1430 5855,1430
NetF1_1 on Top Layer "Top Layer-No Net" (solid, remove dead copper, pour order 17): 5855,1860 5855,2100 5525,2100 5525,2075 5100,2075 5100,1860 5855,1860
GND on Top Layer "Top Layer-No Net" (solid, remove dead copper, pour order 15): 4750,1735 4750,1575 5525,1575 5525,1675 5855,1675 5855,1850 5250,1850 5250,1795 4880,1795 4880,1735
GND on Top Layer "Top Layer-No Net" (solid, remove dead copper, pour order 10): 3965,2230 4670,2230 4670,1750 4535,1750 4535,1685 4530,1680 4480,1680 4480,1750 4475,1755 4470,1760 4385,1760 3965,1760
GND on Top Layer "Top Layer-No Net" (solid, remove dead copper, pour order 10): 3260,2230 3965,2230 3965,1750 3830,1750 3830,1685 3825,1680 3775,1680 3775,1750 3770,1755 3765,1760 3680,1760 3260,1760
GND on Top Layer "Top Layer-No Net" (solid, remove dead copper, pour order 10): 2555,2230 3260,2230 3260,1750 3125,1750 3125,1685 3120,1680 3070,1680 3070,1750 3065,1755 3060,1760 2975,1760 2555,1760
GND on Top Layer "Top Layer-No Net" (solid, remove dead copper, pour order 10): 1850,2230 2555,2230 2555,1750 2420,1750 2420,1685 2415,1680 2365,1680 2365,1750 2360,1755 2355,1760 2270,1760 1850,1760
NetF1_1 on Bottom Layer "Top Layer-No Net" (solid, remove dead copper, pour order 17): 5855,1860 5855,2100 5525,2100 5525,2075 5100,2075 5100,1860 5855,1860
+12VCC1 on Bottom Layer "Top Layer-No Net" (solid, remove dead copper, pour order 8): 5065,1000 5065,1425 5065,1480 4915,1480 4765,1480 4765,1425 1850,1425 1850,1000
GND on Bottom Layer "Top Layer-No Net" (solid, remove dead copper, pour order 3): 4670,1440 3965,1440 3965,2230 4670,2230
GND on Bottom Layer "Top Layer-No Net" (solid, remove dead copper, pour order 3): 3965,1440 3260,1440 3260,2230 3965,2230
GND on Bottom Layer "Top Layer-No Net" (solid, remove dead copper, pour order 3): 3260,1440 2555,1440 2555,2230 3260,2230
GND on Bottom Layer "Top Layer-No Net" (solid, remove dead copper, pour order 3): 2555,1440 1850,1440 1850,2230 2555,2230
GND on Groun Plane (split plane): 6979.9,1020.1 1020.1,1020.1 1020.1,4979.9 6979.9,4979.9
+12VCC1 on Power Plane (split plane): 5091.15,1388.75 5091.15,1020.1 1855.1,1020.1 1855.1,1424.9 4725,1424.9 4726.95,1425.29 4728.6,1426.4 4777.11,1474.9 5091.15,1474.9
3.3VCC on Power Plane (split plane): 6979.9,1020.1 5101.35,1020.1 5101.35,1388.75 5101.35,1480 5100.96,1481.95 5099.85,1483.6 5098.2,1484.71 5096.25,1485.1 4775,1485.1 4773.05,1484.71 4771.4,1483.6 4722.89,1435.1 1850,1435.1 1848.05,1434.71 1846.4,1433.6 1845.29,1431.95 1844.9,1430 1844.9,1020.1 1020.1,1020.1 1020.1,4979.9 6979.9,4979.9

## Keep-outs
Keep-Out Layer:
  lines w10: 1835,2240 1700,2105 1700,1015 5875,1015 5875,3085

## Other copper
Power Plane (plane layer: these items are gaps in the copper):
  lines w10: 1850,1000 1850,1430 4725,1430 4775,1480 5096.25,1480 5096.25,1388.75 5096.25,1013.75 5096.25,1001.25 5095,1000

## Silkscreen, mask and mechanical layers (free items; w line width, h text height)
Top Overlay:
  lines w10: 1715,1030 1895,1030 1895,1210 1715,1210 1715,1030 ; 5680,1030 5680,1210 5860,1210 5860,1030 5680,1030
Mechanical 15:
  lines w10: 1680,5600 1680,1000 6500,1000

## Text inside footprints (layer, text, board x,y; h text height)
FAN-1: Mechanical 16 "1" at 5762.5,3137.5 h62 r90
FAN-2: Mechanical 16 "1" at 5762.5,3507.5 h62 r90
MAX1A: Mechanical 16 "1" at 2162.5,3487.5 h62
MAX1B: Mechanical 16 "1" at 2575.06,3487.5 h62
MAX1C: Mechanical 16 "1" at 2987.5,3487.5 h62
MIN1A: Mechanical 16 "1" at 2487.5,3852.5 h62 r180
MIN1B: Mechanical 16 "1" at 2900.06,3852.5 h62 r180
MIN1C: Mechanical 16 "1" at 3312.5,3852.5 h62 r180
MOSFETS: Top Overlay "4" at 5787.84,2795.36 h77.5 r90; Top Overlay "3" at 5787.84,2595.36 h77.5 r90; Top Overlay "2" at 5787.84,2395.36 h77.5 r90; Top Overlay "1" at 5787.84,2210.36 h77.5 r90
P1A: Mechanical 16 "1" at 7957.5,8427.5 h62
P1B: Mechanical 16 "1" at 7957.5,8867.5 h62
"PWR INPUT": Top Overlay "4" at 5590,1475 h77.5 r270; Top Overlay "3" at 5590,1675 h77.5 r270; Top Overlay "2" at 5590,1875 h77.5 r270; Top Overlay "1" at 5590,2060 h77.5 r270